# Altium PCB PCB.PcbDoc
Units mil, origin at the board's own origin, x right, y up, seen from the top; angles counter-clockwise.
Board outline 2765.94 x 1584.83 mil, 2 copper layers (Top Layer, Bottom Layer); 12 components, 9 nets, 31 pads, 0 vias.
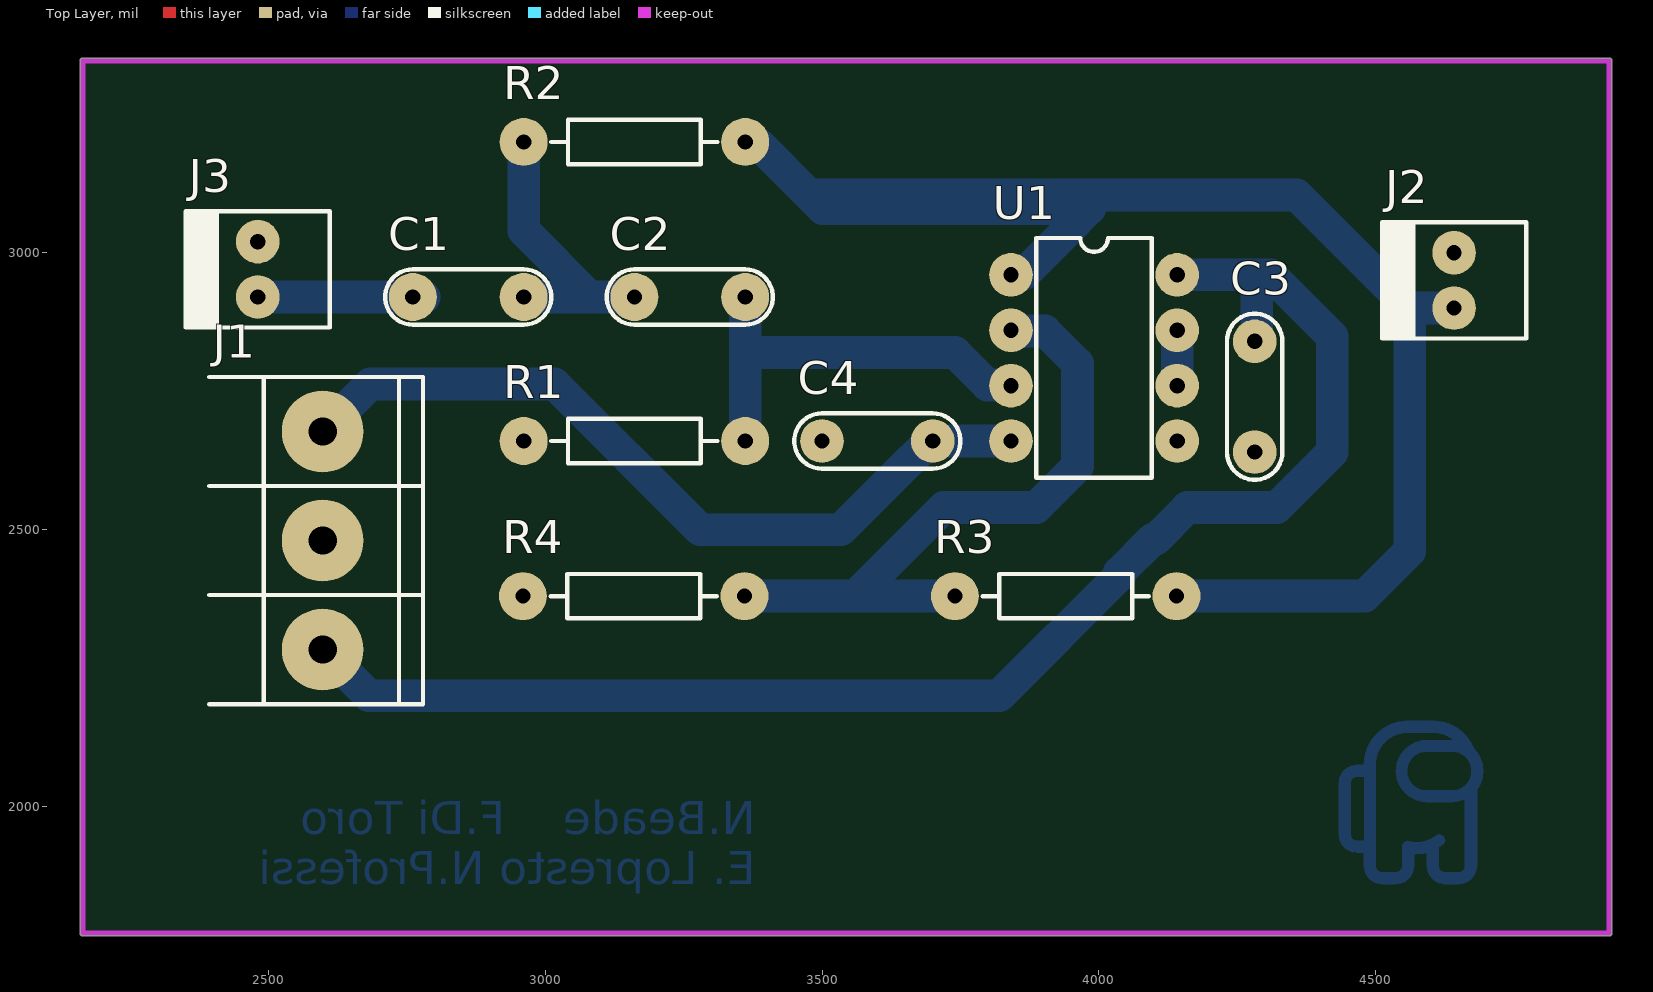
[diagram p0: Top Layer view]
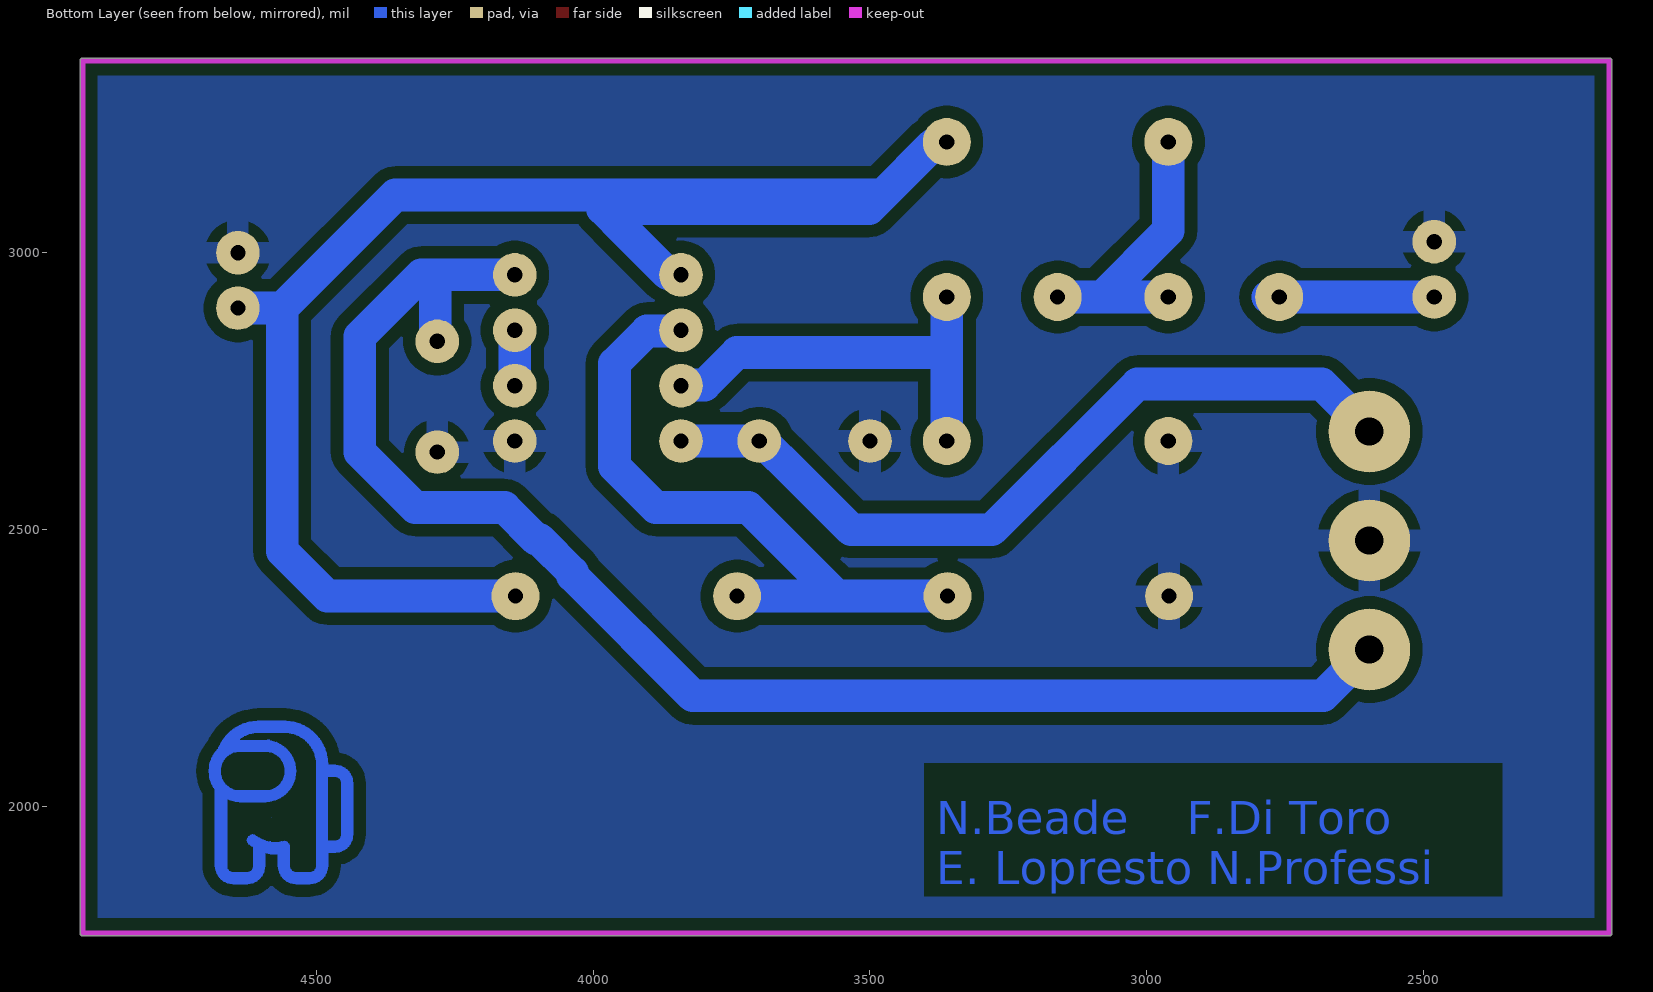
[diagram p1: Bottom Layer view, seen from below]
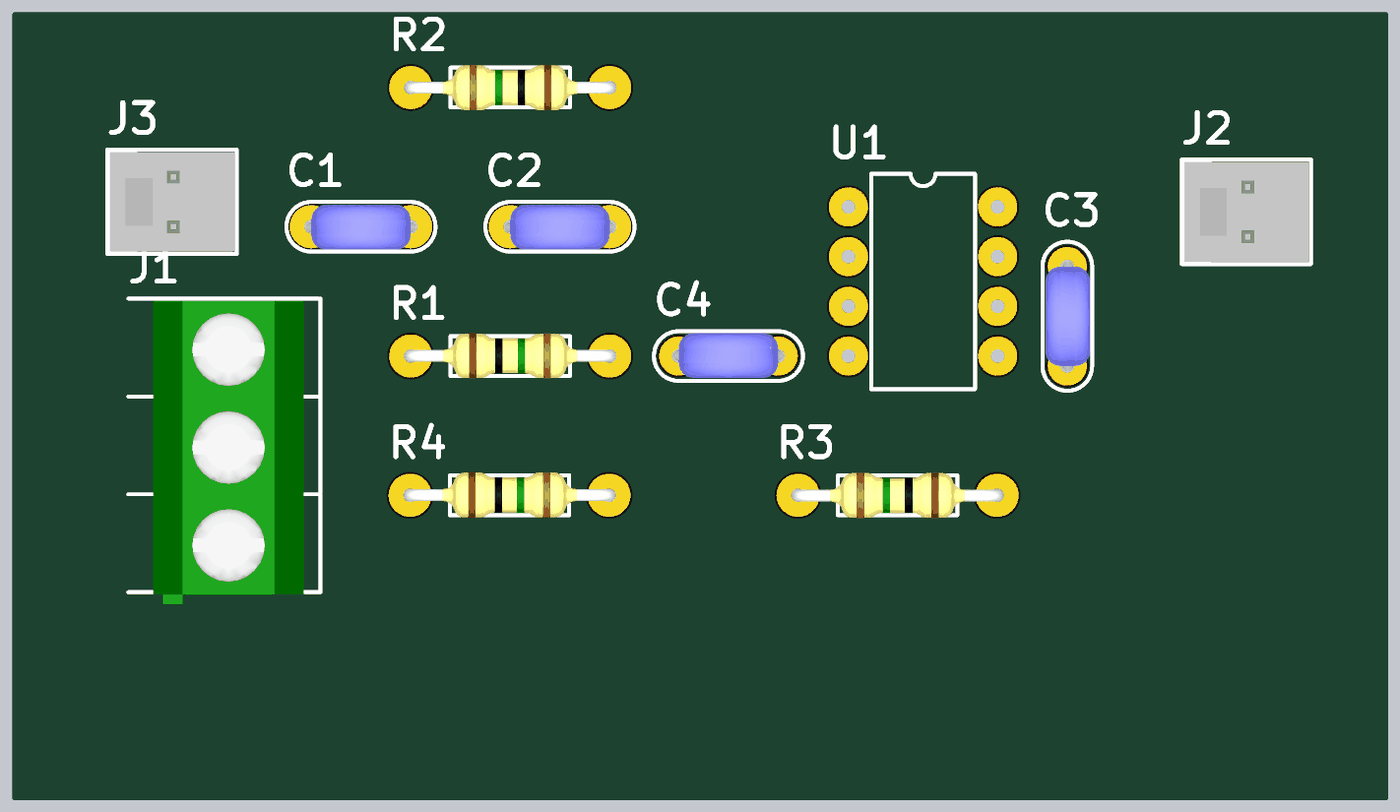
[diagram p2: 3D render of the assembled board from above, using the file's embedded part models]

## Layer stack, top to bottom
Top Solder: solder mask 0.4, Solder Resist, Dk 3.5
Top Layer: signal copper 1.4
Dielectric 1: dielectric 12.6, FR-4, Dk 4.8
Bottom Layer: signal copper 1.4
Bottom Solder: solder mask 0.4, Solder Resist, Dk 3.5

## Board outline
2160.34,1771.65 ccw(c2165.35,1771.65) 2165.35,1766.64 4921.26,1766.64 ccw(c4921.26,1771.65) 4926.27,1771.65 4926.27,3346.46 ccw(c4921.26,3346.46) 4921.26,3351.47 2165.35,3351.47 ccw(c2165.35,3346.46) 2160.34,3346.46

## Design rules (kind name [scope] priority, off if disabled: settings)
Clearance [All] p1: gap=22 ignorepadtopadclearanceinfootprint=TRUE
PlaneConnect [All] p1: planeconnectstyle=Relief reliefexpansion=30 reliefentries=4 reliefconductorwidth=40 reliefairgap=30
PolygonConnect [All] p1: connectstyle=Relief reliefconductorwidth=40 reliefentries=4 polygonreliefangle="90 Angle" airgapwidth=20
RoutingVias [All] p1: holewidth=27.56 width=78.74 viastyle="Through Hole" minholewidth=19.68 minwidth=78.74 maxholewidth=39.37 maxwidth=196.85
SolderMaskExpansion [All] p1: expansion=4 istentingtop=FALSE
UnRoutedNet [All] p1: checkbadconnections=TRUE
Width [All] p1: maxlimit=196.85 minlimit=39.37 preferedwidth=59.06
28 further rules are at their usual default settings.

## Components (designator, comment, footprint, x,y, rotation, side; value= is the part's Value field where it differs from the comment)
C1 "100n" CAP200#1 2861.26,2920 r0 top
C2 "100n" CAP200#1 3261.26,2920 r0 top
C3 "100n" CAP200#2 4281.26,2740 r90 top
C4 "100n" CAP200#2 3600,2660 r180 top
J1 "BORNERA 3" BORNERA3 2598.43,2480.32 r180 top
J2 "MOLEX2" MOLEX2 4641.26,2900 r90 top
J3 "MOLEX2" MOLEX2 2481.26,2920 r90 top
R1 "8.1k" RES400 2961.26,2660 r0 top
R2 "8.1k" RES400 3361.26,3200 r180 top
R3 "10k" RES400 4140,2380 r180 top
R4 "8.1k" RES400 2960,2380 r0 top
U1 "TL082P" P008 3991.26,2810 r270 top

## Footprints (in the part's own frame and the unit in brackets; to place one, negate y for a bottom-side part, rotate by r counter-clockwise, add the part's x,y. Pads: shape width x height; smd on the part's side, far side on the other; paste and mask are expansions set on the pad)
BORNERA3 [mm] "Bornera con Tornillos 5mm separación"
  round 3.75 hole 1.3: 1(0,5) 2(0,0) 3(0,-5)
  silkscreen extent -4.6,-7.5 5.2,7.5, body extent -3.76,-7.39 3.94,8.11, height 10.05
CAP200#1 [mm]
  round 2.2 hole 0.7: 1(-2.54,0) 2(2.54,0)
  silkscreen extent -3.81,-1.27 3.81,1.27, body extent -2.79,-1.17 2.79,1.12, height 6.24
CAP200#2 [mm]
  round 2 hole 0.7: 1(-2.54,0) 2(2.54,0)
  silkscreen extent -3.81,-1.27 3.81,1.27, body extent -2.79,-1.17 2.79,1.12, height 6.24
MOLEX2 [mm]
  round 2 hole 0.7: 1(0,0) 2(2.54,0)
  silkscreen extent -1.4,-3.3 3.94,3.3, body extent -1.27,-3.17 3.81,3.18, height 10.74
P008 [mm] "DIP; 8 Leads; Row Spacing 7.62 mm; Pitch 2.54 mm"
  round 2 hole 0.7: 1(-3.81,-3.81) 2(-1.27,-3.81) 3(1.27,-3.81) 4(3.81,-3.81) 5(3.81,3.81) 6(1.27,3.81) 7(-1.27,3.81) 8(-3.81,3.81)
  silkscreen extent -5.5,-2.65 5.5,2.65
RES400 [mm]
  round 2.2 hole 0.7: 1(0,0) 2(10.16,0)
  silkscreen extent 1.27,-1.02 8.89,1.02, body extent -0.3,-1.14 10.46,1.17, height 2.43

## Part data
C1 C2 C3 C4: library part CAP
R1 R2 R3 R4: library part RES
U1: "JFET-Input Operational Amplifier", Code_JEDEC=MO-001-AN, ComponentLink1Description="Manufacturer Link", ComponentLink1URL=http://www.ti.com/, ComponentLink2Description=Datasheet, ComponentLink2URL=http://www-s.ti.com/sc/ds/tl082.pdf, DatasheetVersion=Feb-1999, LatestRevisionDate=04-Mar-2005, LatestRevisionNote="Stylized 3D Model Added.", PackageDescription="DIP; 8 Leads; Row Spacing 7.62 mm; Pitch 2.54 mm", PackageReference=P008, PackageVersion=Jun-1999, Published=16-Jan-2001, Publisher="Altium Limited"

## Nets (pads, with @x,y where several pads share a name; then routed paths per layer and width w, separated by ;. In a path a pad name is that pad's centre, name@x,y a point inside that pad or via, vN(x,y) a via of type N, cw(c..) or ccw(c..) an arc to the next point about the centre after c; other vN are vias at no path point)
+VCC: C3.2 J1.1 U1.8 | length 2709.4
  Bottom Layer w59.06: J1.1 2681.89,2200 3820,2200 4037.17,2417.17 4037.17,2422.6 4097.4,2482.83 4102.83,2482.83 4160,2540 4321.12,2540 4421.26,2640.14 4421.26,2848.64 4309.9,2960 ; U1.8 4285.03,2960 4309.9,2960 ; C3.2 4285.03,2843.77 4285.03,2935.12 4309.9,2960
-VCC: C4.1 J1.3 U1.4 | length 1433
  Bottom Layer w59.06: J1.3@2594.96,2673.7 2684.09,2762.83 3017.17,2762.83 3280,2500 3534.06,2500 3663.11,2629.06 3663.73,2629.06 3694.67,2660 U1.4@3815.93,2660
GND: C3.1 C4.2 J1.2 J2.2 J3.2 R1.1 R4.1 U1.5
NetC1_2: C1.2 C2.1 R2.2 | length 509.7
  Bottom Layer w59.06: R2.2 2961.26,3040 3081.26,2920 ; C1.2@2981.26,2920 3081.26,2920 ; C2.1 3081.26,2920
NetC2_2: C2.2 R1.2 U1.3 | length 764.9
  Bottom Layer w59.06: R1.2 3361.26,2820 ; C2.2 3361.26,2820 ; U1.3 3840.16,2761.1 3798.9,2761.1 3740,2820 3361.26,2820
NetR3_2: R3.2 R4.2 U1.2 | length 1208.7
  Bottom Layer w59.06: R4.2 3560,2380 ; R3.2 3560,2380 ; U1.2 3842.68,2858.58 3902.68,2858.58 3961.26,2800 3961.26,2614.59 3886.67,2540 3720,2540 3560,2380
NetU1_6: U1.6 U1.7 | length 100
  Bottom Layer w59.06: U1.6 U1.7
Vin: C1.1 J3.1 | length 300
  Bottom Layer w59.06: J3.1 C1.1@2781.26,2920
Vout: J2.1 R2.1 R3.1 U1.1 | length 3014.6
  Bottom Layer w59.06: R2.1 3366.53,3194.73 3386.53,3194.73 3476.93,3104.33 ; U1.1@3835.03,2953.77 3843.15,2961.89 3865.04,2961.89 3941.74,3038.58 3983.15,3080 3501.26,3080 3476.93,3104.33 ; R3.1 4480,2380 4561.26,2461.26 4561.26,2900 ; J2.1 4561.26,2900 ; 3476.93,3104.33 4356.93,3104.33 4561.26,2900
copper on no net: | length 0

## Polygon pours and split planes (outlines as drawn)
GND on Bottom Layer "GND_L02_P000" (solid, pour order 0): 2160.34,3359.15 2160.34,1758.96 4938.96,1758.96 4938.96,3359.15

## Keep-outs
Keep-Out Layer:
  lines w10: 4921.26,2007.87 4921.26,1968.5 ; 4921.26,1968.5 4921.26,1771.65 2165.35,1771.65 2165.35,1968.5 2165.35,3346.46 4921.26,3346.46 4921.26,1968.5

## Other copper
Bottom Layer:
  region: 1338 vertices and 3 holes, not listed, extent 4432.85,1859.66 4694.07,2154.96
  text "N.Beade    F.Di Toro / E. Lopresto N.Professi" at 3380,1860 h60